# Altium PCB NS7 Regulator.PcbDoc
Units mm, origin at the board's own origin, x right, y up, seen from the top; angles counter-clockwise.
Board outline 126 x 75 mm, 2 copper layers (Top Layer, Bottom Layer), stack 1.671 mm thick; 34 components, 13 nets, 99 pads, 39 vias.
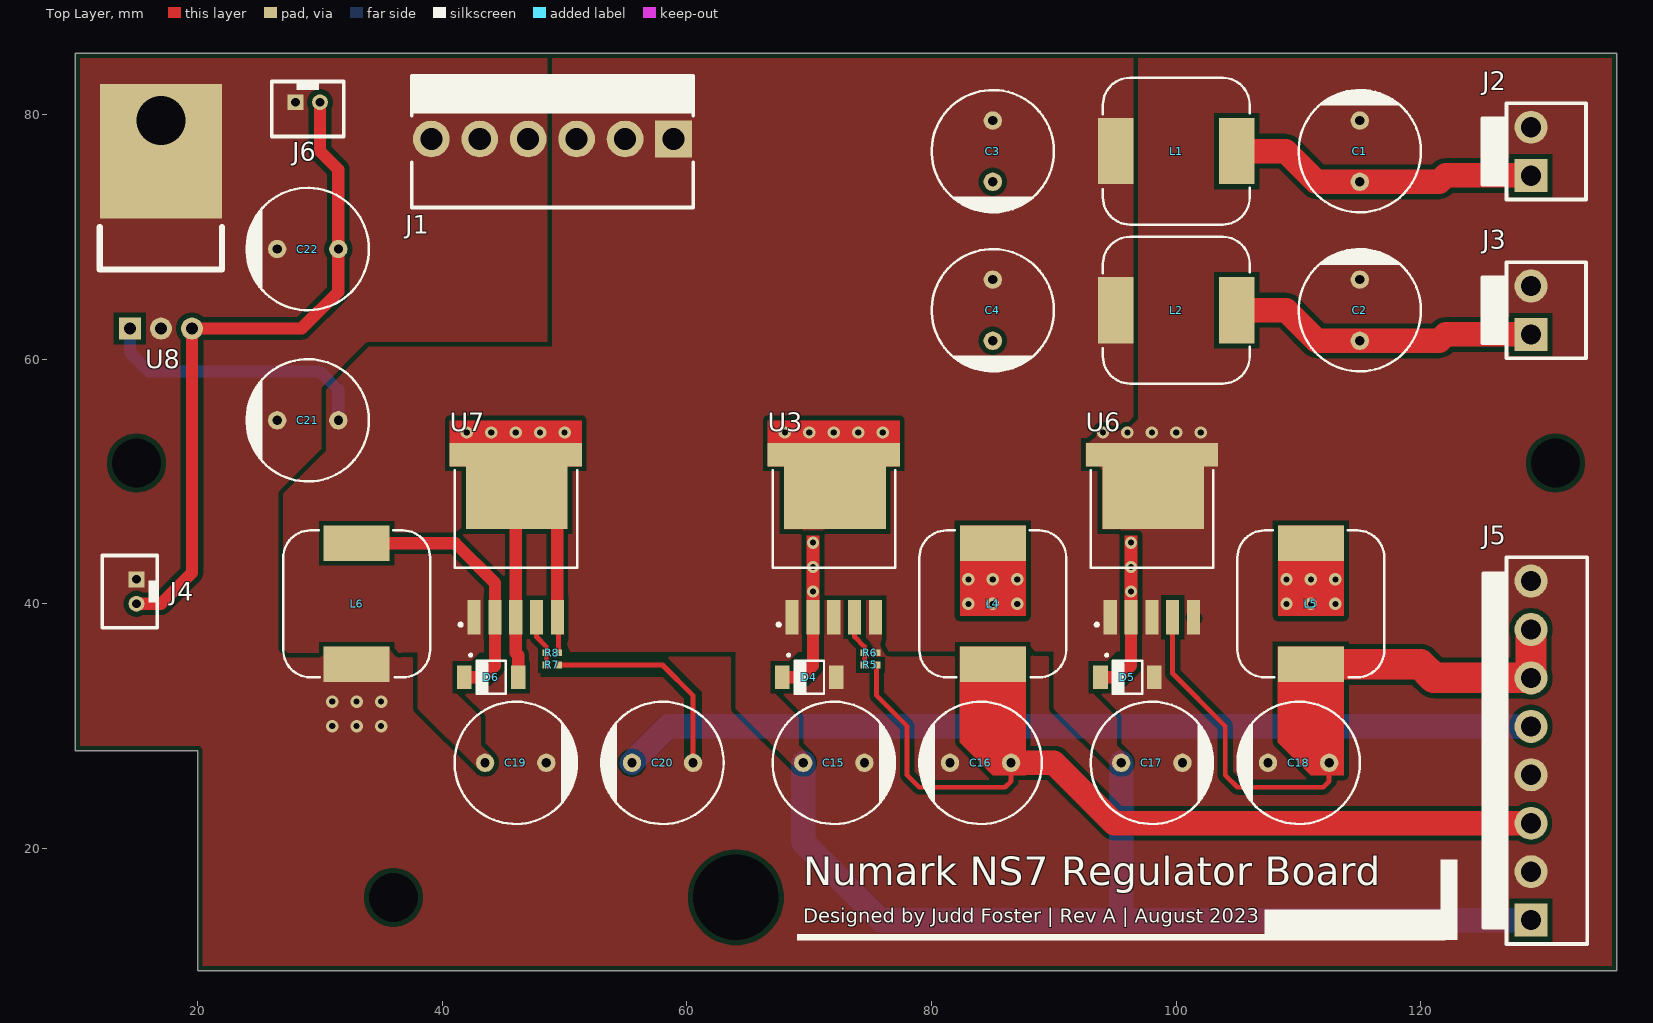
[diagram p0: Top Layer view]
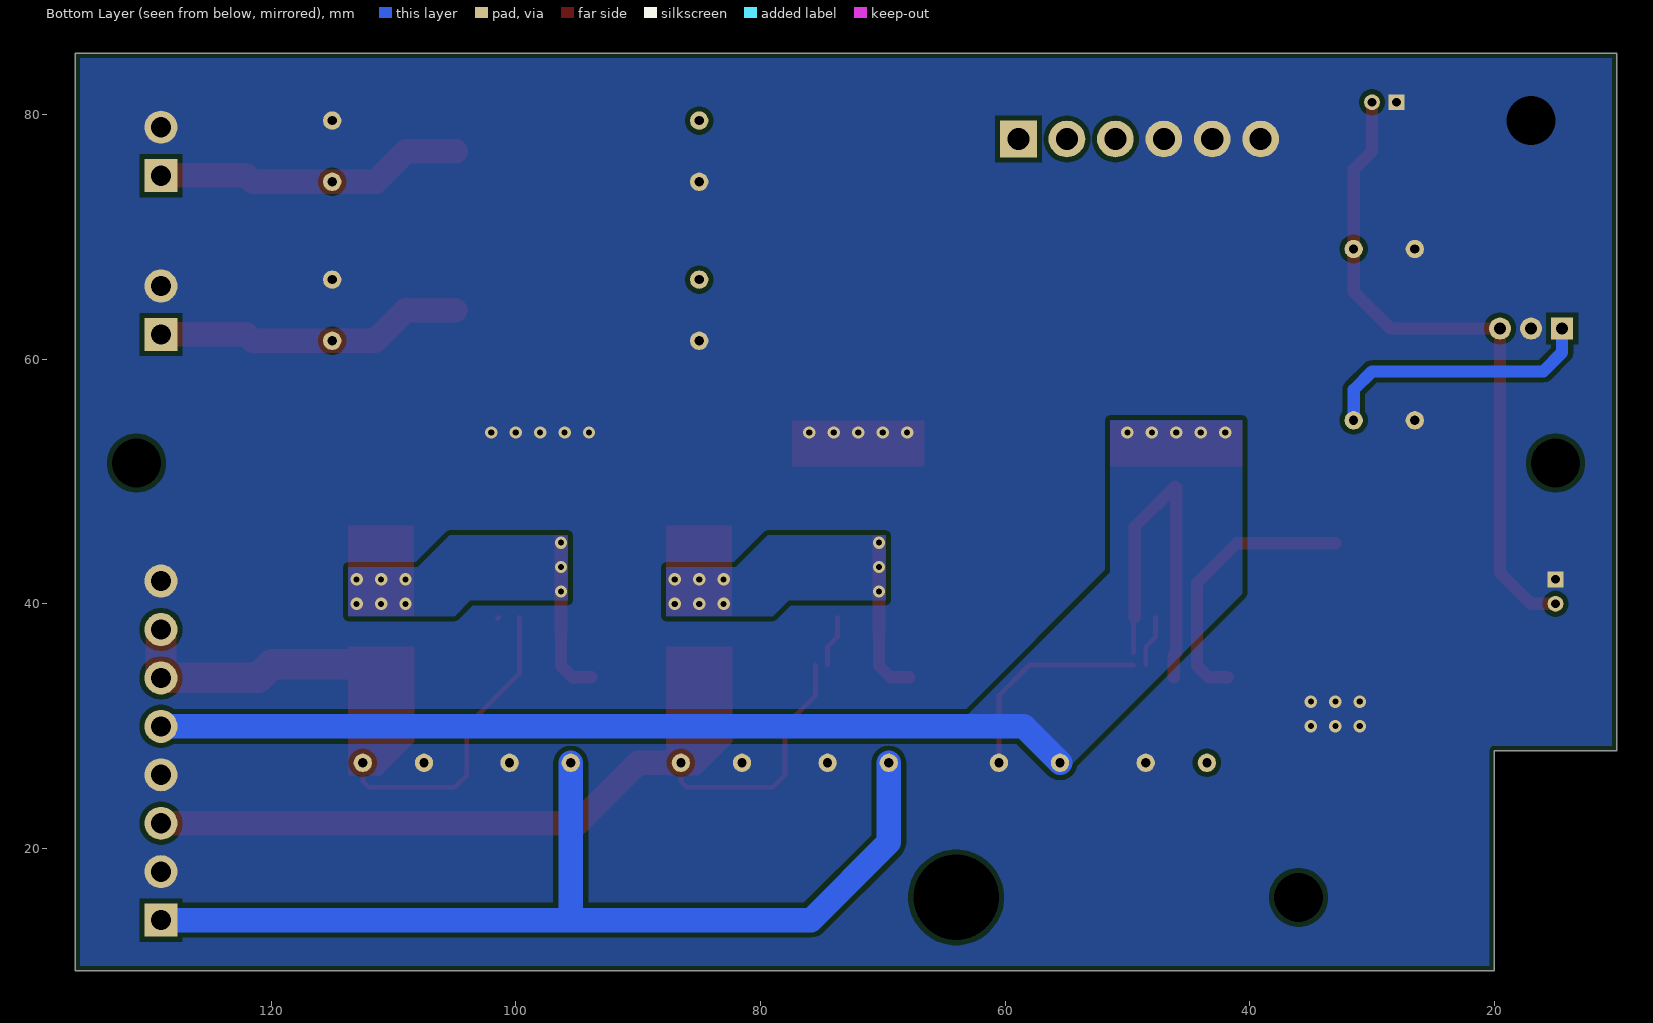
[diagram p1: Bottom Layer view, seen from below]
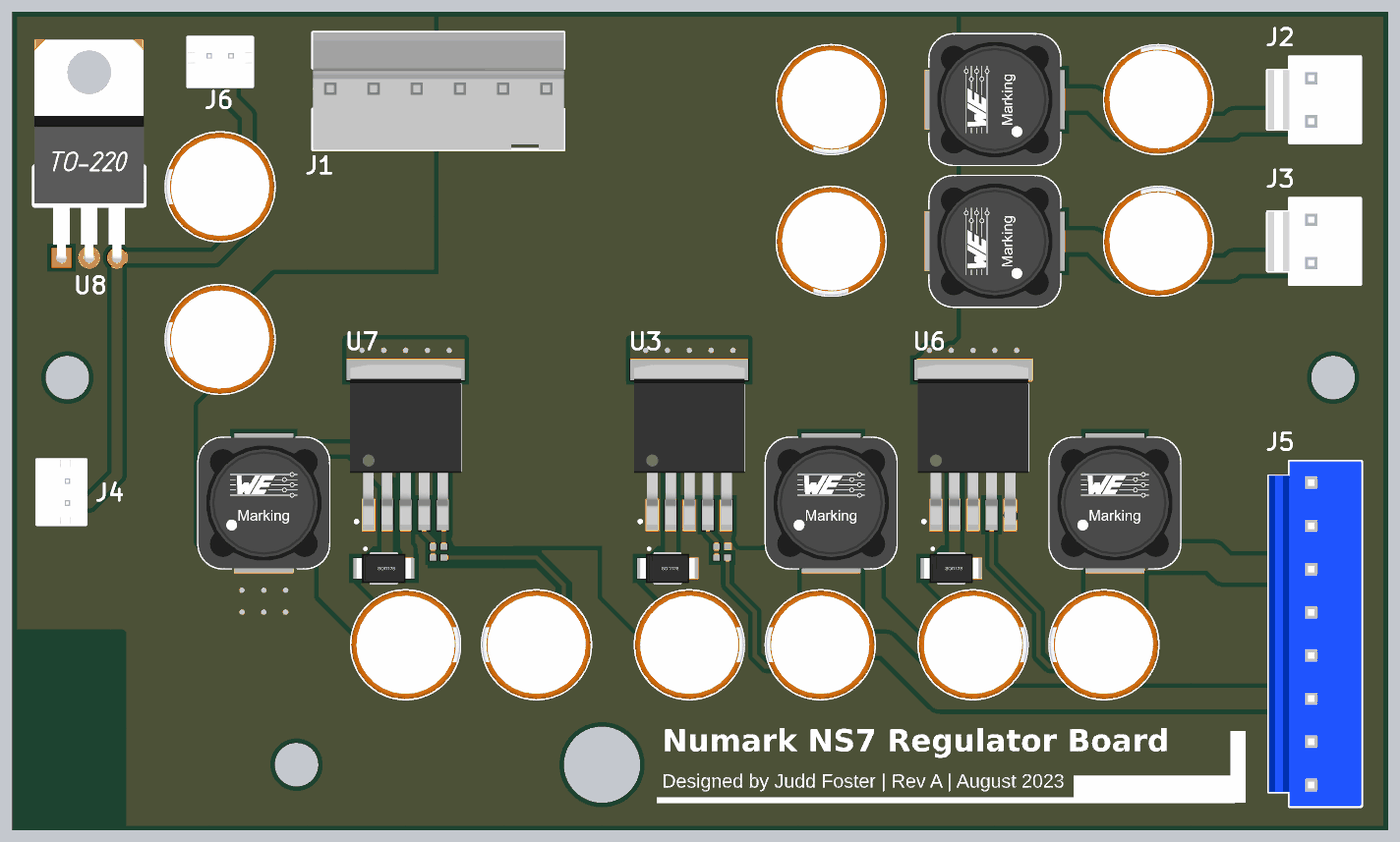
[diagram p2: 3D render of the assembled board from above, using the file's embedded part models]

## Layer stack, top to bottom
Top Solder: solder mask 0.0102, Solder Resist, Dk 3.5
Top Layer: signal copper 0.0356
Dielectric1: dielectric 1.6, FR-4, Dk 4.8
Bottom Layer: signal copper 0.0356
Bottom Solder: solder mask 0.0102, Solder Resist, Dk 3.5

## Board outline
10,28 20,28 20,10 136,10 136,85 10,85

## Design rules (kind name [scope] priority, off if disabled: settings)
BoardOutlineClearance [All] p1: gap=0.4 ignorepadtopadclearanceinfootprint=FALSE except(0: Arc-SplitContinuation Track-SplitContinuation SMDPad-SplitContinuation THPad-SplitContinuation Via-SplitContinuation Fill-SplitContinuation Poly-SplitContinuation Region-SplitContinuation Text-SplitContinuation)
Clearance [All] p1: gap=0.2 ignorepadtopadclearanceinfootprint=FALSE except(0: Arc-Hole Track-Hole SMDPad-Hole THPad-Hole Via-Hole Fill-Hole Poly-Hole Region-Hole Text-Hole; 0.4: Arc-Fill Arc-Poly Arc-Region Track-Fill Track-Poly Track-Region SMDPad-Fill SMDPad-Poly SMDPad-Region THPad-Fill THPad-Poly THPad-Region Via-Fill Via-Poly Via-Region Fill-Fill Fill-Poly Fill-Region Poly-Poly Poly-Region Region-Region)
HoleSize [All] p1: absolutevalues=TRUE maxlimit=10 minlimit=0.4 maxpercent=80.000 minpercent=20.000
MinimumSolderMaskSliver [All] p1: minsoldermaskwidth=0
PolygonConnect [All] p1: connectstyle=Direct reliefconductorwidth=0.254 reliefentries=4 polygonreliefangle="90 Angle" airgapwidth=0.254
RoutingVias [All] p1: holewidth=0.5 width=1 viastyle="Through Hole" minholewidth=0.5 minwidth=1 maxholewidth=0.5 maxwidth=1
SilkToSolderMaskClearance [IsPad] p1: minsilkscreentomaskgap=0 clearancetoexposedcopper=TRUE
SolderMaskExpansion SolderMaskExpansion_Via [IsVia] p1: expansion=0.102 istentingtop=TRUE
SolderMaskExpansion [All] p2: expansion=0.102 istentingtop=FALSE
Width [All] p1: maxlimit=20 minlimit=0.2 preferedwidth=2
27 further rules are at their usual default settings.

## Components (designator, comment, footprint, x,y, rotation, side; value= is the part's Value field where it differs from the comment)
C1 "220uF" Cap,Alum,Thru,D10,H17.5 115,77 r90 top
C2 "220uF" Cap,Alum,Thru,D10,H17.5 115,64 r90 top
C3 "220uF" Cap,Alum,Thru,D10,H17.5 85,77 r270 top
C4 "220uF" Cap,Alum,Thru,D10,H17.5 85,64 r270 top
C15 "220uF" Cap,Alum,Thru,D10,H17.5 72,27 r0 top
C16 "220uF" Cap,Alum,Thru,D10,H17.5 84,27 r180 top
C17 "220uF" Cap,Alum,Thru,D10,H17.5 98,27 r0 top
C18 "220uF" Cap,Alum,Thru,D10,H17.5 110,27 r180 top
C19 "220uF" Cap,Alum,Thru,D10,H17.5 46,27 r0 top
C20 "220uF" Cap,Alum,Thru,D10,H17.5 58,27 r180 top
C21 "220uF" Cap,Alum,Thru,D10,H17.5 29,55 r180 top
C22 "220uF" Cap,Alum,Thru,D10,H17.5 29,69 r180 top
D4 "PMEG6030EVPX" SOD128 70,34 r0 top
D5 "PMEG6030EVPX" SOD128 96,34 r0 top
D6 "PMEG6030EVPX" SOD128 44,34 r0 top
J1 "0009652068" MOLEX_0009652068 49,78 r180 top locked
J2 "B2P-VH" JST_B2P-VH 129,76.98 r90 top locked
J3 "B2P-VH" JST_B2P-VH 129,64 r90 top locked
J4 "B2B-PH-K-S(LF)(SN)" JST_B2B-PH-K-S 15,41 r270 top
J5 "B8P-VH(LF)(SN)" JST_B8P-VH 129,28 r90 top locked
J6 "B2B-PH-K-S(LF)(SN)" JST_B2B-PH-K-S 29,81 r0 top locked
L1 "100uH" IND,WIREWOUND,12x12,SMD 100,77 r0 top
L2 "100uH" IND,WIREWOUND,12x12,SMD 100,64 r0 top
L4 "100uH" IND,WIREWOUND,12x12,SMD 85,40 r270 top
L5 "100uH" IND,WIREWOUND,12x12,SMD 111,40 r270 top
L6 "100uH" IND,WIREWOUND,12x12,SMD 33,40 r270 top
R5 "15k" RES,0402 75,35 r0 top
R6 "1k1" RES,0402 75,36 r180 top
R7 "15k" RES,0402 49,35 r0 top
R8 "1k1" RES,0402 49,36 r180 top
U3 "LM2576SX-ADJ" TO263-5 72,45 r90 top
U6 "LM2576SX-5.0" TO263-5 98,45 r90 top
U7 "LM2576SX-ADJ" TO263-5 46,45 r90 top
U8 "L78S10CV" "TO-220,PCB Mount" 17,71 r0 top locked

## Footprints (in the part's own frame and the unit in brackets; to place one, negate y for a bottom-side part, rotate by r counter-clockwise, add the part's x,y. Pads: shape width x height; smd on the part's side, far side on the other; paste and mask are expansions set on the pad)
Cap,Alum,Thru,D10,H17.5 [mm] "Rubycon 50YXG220MEFCT810X16"
  round 1.5 hole 0.75 mask+0.05: 1(-2.5,0) 2(2.5,0)
  silkscreen extent -5,-5 5,5, body extent -5,-5 5.01,5, height 17.51
IND,WIREWOUND,12x12,SMD [mm] "Würth Elektronik 7447709101"
  rect 2.9x5.4 smd mask+0.05: 1(-4.95,0) 2(4.95,0)
  silkscreen extent -6,-6 6,6, body extent -6,-6 6,6, height 9.26
JST_B2B-PH-K-S [mm] "JST Sales America  / B2B-PH-K-S"
  rect 1.3x1.3 hole 0.7: 1(-1,0)
  round 1.3 hole 0.7: 2(1,0)
  silkscreen extent -2.95,-2.8 2.95,1.7, body extent -2.95,-2.8 2.95,1.7, height 6
JST_B2P-VH [mm] "JST Sales America B2P-VH"
  rect 2.7x2.7 hole 1.65: 1(-1.98,0)
  round 2.7 hole 1.65: 2(1.98,0)
  silkscreen extent -3.93,-4.5 3.93,4, body extent -3.93,-4.5 3.93,4, height 10.95
JST_B8P-VH [mm] "JST Sales America B8P-VH"
  rect 2.7x2.7 hole 1.65: 1(-13.86,0)
  round 2.7 hole 1.65: 2(-9.9,0) 3(-5.94,0) 4(-1.98,0) 5(1.98,0) 6(5.94,0) 7(9.9,0) 8(13.86,0)
  silkscreen extent -15.81,-4.6 15.81,3.9, body extent -15.81,-4.6 15.81,3.9, height 10.95
MOLEX_0009652068 [mm] "Molex 0009652068"
  rect 3x3 hole 1.8: 1(-9.9,0)
  round 3 hole 1.8: 2(-5.94,0) 3(-1.98,0) 4(1.98,0) 5(5.94,0) 6(9.9,0)
  silkscreen extent -11.5,-5.15 11.5,5.6, body extent -11.5,-5.15 11.5,5.6, height 13.85
RES,0402 [mm] "Yageo RC0402FR-0722RL"
  rect 0.6x0.55 smd: 1(-0.5,0) 2(0.5,0)
  body extent -0.5,-0.25 0.5,0.25, height 0.35
SOD128 [mm] "Nexperia PMEG6030EVPX"
  rect 1.2x1.9 smd mask+0.05: 1(-2.2,0) 2(2.2,0)
  silkscreen extent -1.76,-1.35 1.2,1.88, body extent -2.5,-1.35 2.5,1.35, height 1.1
TO263-5 [mm] "Texas Instruments LM2576SX-5.0/NOPB"
  rect 2.8x1.07 smd: 1(-6.1,3.4) 2(-6.1,1.7) 3(-6.1,0) 4(-6.1,-1.7) 5(-6.1,-3.4)
  rect 6.99x8.3 smd: 3(4.6,-0.1)
  rect 1.91x10.8 smd: 3(7.2,0)
  silkscreen extent -6.82,-5.02 5.9,4.98, body extent -6.97,-5.08 7.67,5.08, height 4.57
"TO-220,PCB Mount" [mm] "STMicroelectronics T1235T-8T"
  rect 1.8x1.8 hole 1: 1(-2.54,-8.5)
  round 1.8 hole 1: 2(0,-8.5) 3(2.54,-8.5)
  rect 10x11 / inner rect 10x11 / far side rect 0x0 hole 4 copper offset 0,-2.5 mask+0: 2(0,8.5)
  silkscreen extent -5,-3.66 5,-0.2, body extent -5.01,-8.75 5.01,11.5, height 4.51

## Part data
C1 C2 C3 C4 C15 C16 C17 C18 C19 C20 C21 C22: library part CAP,Alum,220uF,50VDC,Radial,Thru, "220 µF 50 V Aluminum Electrolytic Capacitors Radial, Can 5000 Hrs @ 105°C", Manufacturer=Rubycon, Manufacturer Part Number=50YXG220MEFCT810X16, Vendor Part Number=1189-3771-1-ND, CreatedBy="Judd Foster", HelpURL=https://www.rubycon.co.jp/wp-content/uploads/catalog-aluminum/YXG.pdf, Vendor=Digikey
D4 D5 D6: library part DIODE,Schottky,60V,3A,SMD, "DIODE SCHOTTKY 60V 3A SOD128", Manufacturer="Nexperia USA Inc.", Vendor Part Number=1727-1349-1-ND, CreatedBy="Judd Foster", HelpURL=https://assets.nexperia.com/documents/data-sheet/PMEG6030EVP.pdf, Manufacturer Part Number=PMEG6030EVPX, Vendor=Digikey
J1: library part Conn,Header,Molex,KK,6Pin,3.96mm,Thru, "Connector Header Through Hole 6 position 0.156\" (3.96mm)", Manufacturer=Molex, Vendor Part Number=WM18827-ND, CreatedBy="Judd Foster", HelpURL=https://www.molex.com/pdm_docs/sd/009652068_sd.pdf, Manufacturer Part Number=0009652068, Vendor=DigiKey
J2 J3: library part Conn,Header,JST,VH,2Pin,3.96mm,Thru, "1x2P VH 1 3.96mm 2 Brass Plugin,P=3.96mm Wire To Board / Wire To Wire Connector ROHS", Manufacturer="JST Sales America", Vendor Part Number=C160315, CreatedBy="Judd Foster", HelpURL=https://datasheet.lcsc.com/lcsc/2304140030_JST-Sales-America-B2P-VH-LF-SN_C160315.pdf, Manufacturer Part Number=B2P-VH, Vendor=LCSC
J4 J6: library part Conn,Header,JST,PH,2Pin,2mm,Thru, "1x2P PH 1 2mm 2 Brass Plugin,P=2mm Wire To Board / Wire To Wire Connector ROHS", Manufacturer="JST Sales America", Manufacturer Part Number=B2B-PH-K-S, Vendor Part Number=C131337, CreatedBy="Judd Foster", HelpURL=https://datasheet.lcsc.com/lcsc/2304140030_JST-Sales-America-B2B-PH-K-S-LF-SN_C131337.pdf, Vendor=LCSC
J5: library part Conn,Header,JST,VH,8Pin,3.96mm,Thru, "1x8P VH 1 3.96mm 8 Brass Plugin,P=3.96mm Wire To Board / Wire To Wire Connector ROHS", Manufacturer="JST Sales America", Manufacturer Part Number=B8P-VH, Vendor Part Number=C160320, CreatedBy="Judd Foster", HelpURL=https://datasheet.lcsc.com/lcsc/2304140030_JST-Sales-America-B8P-VH-LF-SN_C160320.pdf, Vendor=LCSC
L1 L2 L4 L5 L6: library part IND,100uH,2.5A,Wirewound,SMD, "FIXED IND 100UH 2.5A 110 MOHM", Manufacturer="Würth Elektronik", Manufacturer Part Number=7447709101, Vendor Part Number=732-1248-1-ND, CreatedBy="Judd Foster", HelpURL=https://www.we-online.de/katalog/datasheet/7447709101.pdf, Vendor=Digikey
R5 R7: library part RES,15k,1%,0.1W,0402, "15 kOhms ±1% 0.063W, 1/16W Chip Resistor 0402 (1005 Metric) Thick Film", Manufacturer="Walsin Technology Corporation", Manufacturer Part Number=WR04X1502FTL, Vendor Part Number=1292-WR04X1502FTLCT-ND, CreatedBy="Judd Foster", HelpURL=http://www.passivecomponent.com/wp-content/uploads/chipR/ASC_WR.pdf, Vendor=Digikey
R6 R8: library part RES,1k1,1%,0.063W,0402, "1.1 kOhms ±1% 0.063W, 1/16W Chip Resistor 0402 (1005 Metric) Moisture Resistant Thick Film", Manufacturer=Yageo, Manufacturer Part Number=RC0402FR-071K1L, Vendor Part Number=311-1.10KLRCT-ND, CreatedBy="Judd Foster", HelpURL=https://www.yageo.com/upload/media/product/productsearch/datasheet/rchip/PYu-RC_Group_51_RoHS_L_12.pdf, Vendor=Digikey
U3 U7: "Buck Switching Regulator IC Positive Adjustable 1.23V 1 Output 3A TO-263-6, D²Pak (5 Leads + Tab), TO-263BA", Manufacturer="Texas Instruments", Manufacturer Part Number=LM2576SX-ADJ/NOPB, Vendor Part Number=LM2576SX-ADJ/NOPBCT-ND, CreatedBy="Judd Foster", HelpURL=http://www.ti.com/lit/ds/symlink/lm2576hv.pdf, Vendor=Digikey
U6: "Buck Switching Regulator IC Positive Fixed 5V 1 Output 3A TO-263-6, D²Pak (5 Leads + Tab), TO-263BA", Manufacturer="Texas Instruments", Manufacturer Part Number=LM2576SX-5.0/NOPB, Vendor Part Number=LM2576SX-5.0/NOPBCT-ND, CreatedBy="Judd Foster", HelpURL=http://www.ti.com/lit/ds/symlink/lm2576hv.pdf, Vendor=Digikey
U8: "Linear Voltage Regulator IC Positive Fixed 1 Output 2A TO-220", Manufacturer=STMicroelectronics, Vendor Part Number=497-6039-5-ND, CreatedBy="Judd Foster", HelpURL=https://www.st.com/content/ccc/resource/technical/document/datasheet/e9/be/53/a3/1f/6f/4f/75/CD00000449.pdf/files/CD00000449.pdf/jcr:content/translations/en.CD00000449.pdf, Manufacturer Part Number=L78S10CV, Vendor=Digikey

## Free pads (board coordinates)
  oval 0.25x0.525 hole 4 unplated: ""(15,51.5) ""(36,16) ""(131,51.5)
  oval 0.25x0.525 hole 7 unplated: ""(64,16)

## Via types
v1: diameter 1, hole 0.5, Top Layer to Bottom Layer, tented both sides, 39 vias

## Nets (pads, with @x,y where several pads share a name; then routed paths per layer and width w, separated by ;. In a path a pad name is that pad's centre, name@x,y a point inside that pad or via, vN(x,y) a via of type N, cw(c..) or ccw(c..) an arc to the next point about the centre after c; other vN are vias at no path point)
NetC1_1: C1.1 J2.1 L1.2 | length 25.3
  Top Layer w2: L1.2@104.9,77 108.95,77 111.45,74.5 C1.1@114.95,74.5 ; C1.1 121.5,74.5 122.02,75.02 J2.1@129,75.02
NetC2_1: C2.1 J3.1 L2.2 | length 25.3
  Top Layer w2: L2.2 109,64 111.5,61.5 C2.1 121.5,61.5 122.02,62.02 J3.1
NetD4_1: D4.1 L4.1 U3.2 | length 9.6
  Top Layer w1: D4.1 69.36,34 70.3,34.94 U3.2 70.3,41.7
  other v1: 83,40 85,40 87,40 70.3,41 83,42 85,42 87,42 70.3,43 70.3,45
NetD5_1: D5.1 L5.1 U6.2 | length 6.8
  Top Layer w1: D5.1 95.36,34 96.3,34.94 U6.2
  other v1: 109,40 111,40 113,40 96.3,41 109,42 111,42 113,42 96.3,43 96.3,45
NetD6_1: D6.1 L6.1 U7.2 | length 22.3
  Top Layer w1: L6.1 41.05,44.95 44.3,41.7 U7.2 44.3,34.94 43.36,34 D6.1
NetR5_1: R5.1 R6.2 U3.4 | length 4.2
  Top Layer w0.4: U3.4 73.7,37.3 74.5,36.5 R6.2 R5.1
NetR7_1: R7.1 R8.2 U7.4 | length 4.2
  Top Layer w0.4: U7.4 47.7,37.3 48.5,36.5 R8.2 R7.1
PS.+5V: C18.1 J5.6 J5.7 L5.2 U6.4 | length 47.7
  Top Layer w0.4: U6.4 99.7,34.3 104,30 104,26 105,25 112,25 112.5,25.5 C18.1
  Top Layer w2.5: L5.2 119.95,35.05 121.06,33.94 J5.6 J5.7
PS.+10V: C22.1 J4.2 J6.2 U8.3 | length 54.9
  Top Layer w1: J4.2 17,40 19.54,42.54 U8.3 28.5,62.5 31.5,65.5 C22.1 31.5,75.5 30,77 J6.2
PS.+18V: C16.1 J5.3 L4.2 R5.2 | length 65.2
  Top Layer w0.4: R5.2 75.5,32.5 78,30 78,26 79,25 86,25 86.5,25.5 C16.1
  Top Layer w2: C16.1 90,27 94.94,22.06 J5.3
PS.+28V: C3.1 C4.1 C15.1 C17.1 C19.1 C21.1 J1.1 J1.2 J1.3 J5.1 L1.1 L2.1 U3.1 U6.1 U7.1 U8.1 | length 104.3
  Bottom Layer w1: U8.1 14.46,60.54 16,59 30,59 31.5,57.5 C21.1
  Bottom Layer w2: C15.1 69.5,20.5 75.86,14.14 95.5,14.14 ; C17.1 95.5,14.14 ; J5.1 95.5,14.14
PS.-18V: C20.2 D6.2 J5.5 R8.1 U7.3 U7.5 | length 105.5
  Top Layer w0.4: U7.5 49.5,38.8 R8.1
  Top Layer w1: D6.2 46.2,35.8 46,36 46,38.9 46,49.5 46.1,49.6 49.4,46.3 U7.5
  Bottom Layer w2: C20.2 58.48,29.98 J5.5
  other v1: 42,54 44,54 46,54 48,54 50,54
PS.COM: C1.2 C2.2 C3.2 C4.2 C15.2 C16.2 C17.2 C18.2 C19.2 C20.1 C21.2 C22.2 D4.2 D5.2 J1.4 J1.5 J1.6 J2.2 J3.2 J4.1 J5.2 J5.4 J5.8 J6.1 L6.2 R6.1 R7.2 U3.3 U3.5 U6.3 U6.5 U8.2 | length 17.7
  Top Layer w0.4: R7.2 58,35 60.5,32.5 C20.1 ; U6.5 U6.5@101.5,38.8
  other v1: 31,30 33,30 35,30 31,32 33,32 35,32 68,54 70,54 72,54 74,54 76,54 94,54 96,54 98,54 100,54 102,54

## Polygon pours and split planes (outlines as drawn)
PS.COM on Top Layer "NONET_L-01_P-001" (solid, pour order 9): 10,85 10,28 20,28 20,10 136,10 136,85
PS.+28V on Top Layer "NONET_L-01_P-001" (solid, remove dead copper, pour order 8): 27,36 27,49 30.5,52.5 30.5,57.5 34,61 49,61 49,85 96.5,85 96.5,36.138
PS.+28V on Top Layer "NONET_L-01_P-001" (solid, pour order 4): 93,35.15 94.15,35.15 95.135,36.135 95.135,37.725 95.135,40.3 92.3,40.3 90,38 90,31.439 94.97,26.47 96.03,27.53 95.135,28.426 95.135,30.715 93,32.85
PS.+28V on Top Layer "NONET_L-01_P-001" (solid, pour order 2): 67,35.15 68.15,35.15 69.135,36.135 69.135,37.725 69.135,40.3 66.3,40.3 64,38 64,31.439 68.97,26.47 70.03,27.53 69.135,28.426 69.135,30.715 67,32.85
PS.+28V on Top Layer "NONET_L-01_P-001" (solid, pour order 0): 41,35.15 42.15,35.15 43.135,36.135 43.135,37.725 43.135,40.3 40.3,40.3 38,38 38,31.439 42.97,26.47 44.03,27.53 43.135,28.426 43.135,30.715 41,32.85
PS.COM on Bottom Layer "NONET_L-01_P-001" (solid, pour order 10): 136,10 20,10 20,28 10,28 10,85 136,85
PS.-18V on Bottom Layer "NONET_L-01_P-001" (solid, pour order 1): 64,30 58.5,30 54.97,26.47 40.6,40.839 40.6,55 51.4,55 51.4,42.6
NetD4_1 on Bottom Layer "NONET_L-01_P-001" (solid, pour order 7): 87.7,39 79,39 77.7,40.3 69.765,40.3 69.765,45.6 79.401,45.6 82.001,43 87.7,43
NetD5_1 on Bottom Layer "NONET_L-01_P-001" (solid, pour order 6): 113.7,39 105,39 103.7,40.3 95.765,40.3 95.765,45.6 105.401,45.6 108.001,43 113.7,43

## Other copper
Top Layer:
  rectangle net NetD4_1: 69.765,37.5 70.835,45.6
  rectangle net NetD4_1: 82.3,39 87.7,46.4
  rectangle net NetD5_1: 108.3,39 113.7,46.4
  rectangle net NetD5_1: 95.765,37.5 96.835,45.6
  rectangle net PS.COM: 66.6,51.245 77.4,55
  rectangle net PS.-18V: 40.6,51.245 51.4,55
  pour cut-out: 61.25,27 61.25,32.75 58,36 48,36 48,34 58,34 59.75,32.25 59.75,27
  region net PS.+5V: 108.3,36.5 108.3,28.7 111,26 113.7,26 113.7,36.5
  region net PS.+18V: 82.3,36.5 82.3,28.7 85,26 87.7,26 87.7,36.5

## Silkscreen, mask and mechanical layers (free items; w line width, h text height)
Top Overlay:
  rectangle: 121.594,12.5 123,19.1
  region: 122,12.494 122,15 107.2,15 107.2,12.494
  region: 107.3,12.494 107.3,13 69,13 69,12.494
  text "Numark NS7 Regulator Board" at 69.5,16.229 h4
  text "Designed by Judd Foster | Rev A | August 2023" at 69.5,13.538 h2
Board Shape:
  circle w0.1: c131,51.5 r2
  circle w0.1: c15,51.5 r2
  circle w0.1: c36,16 r2
  circle w0.1: c64,16 r3.5
  lines w0.1: 10,28 10,85 136,85 136,10 20,10 20,28 10,28